# Altium PCB wearable2.PcbDoc
Units mil, origin at the board's own origin, x right, y up, seen from the top; angles counter-clockwise.
Board outline 1023.62 x 1574.8 mil, 4 copper layers (Top Layer, GND, PWR, Bottom Layer), stack 23.756 mil thick; 39 components, 31 nets, 190 pads, 107 vias.
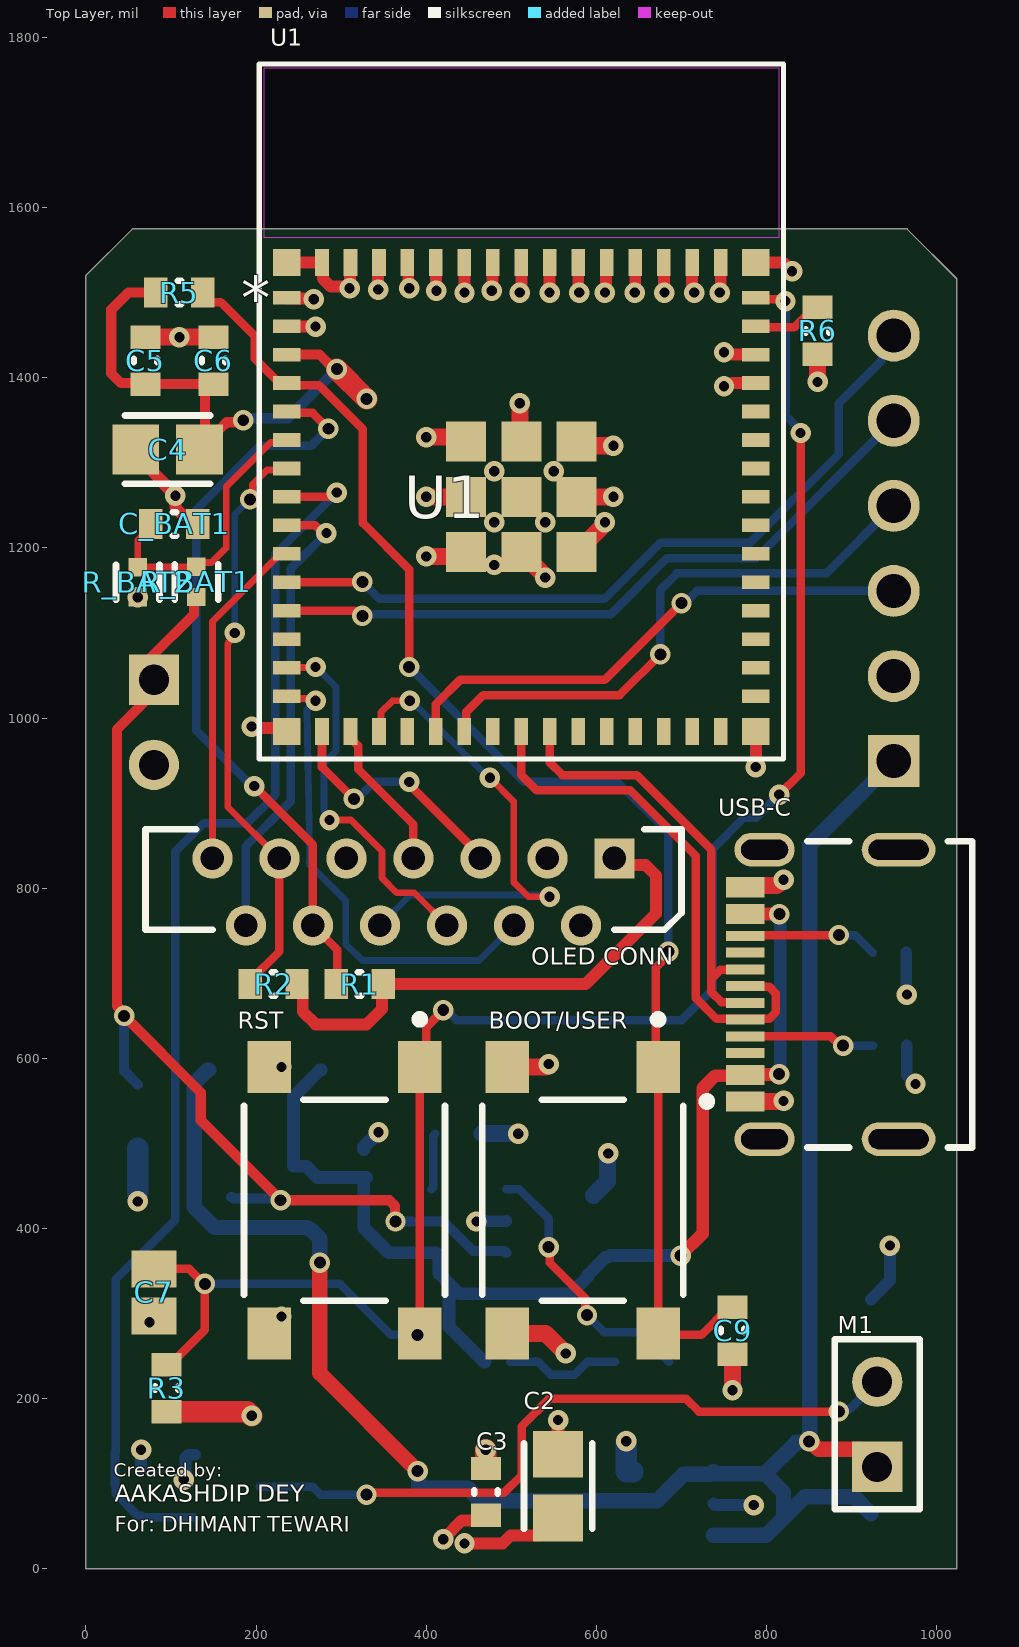
[diagram p0: Top Layer view]
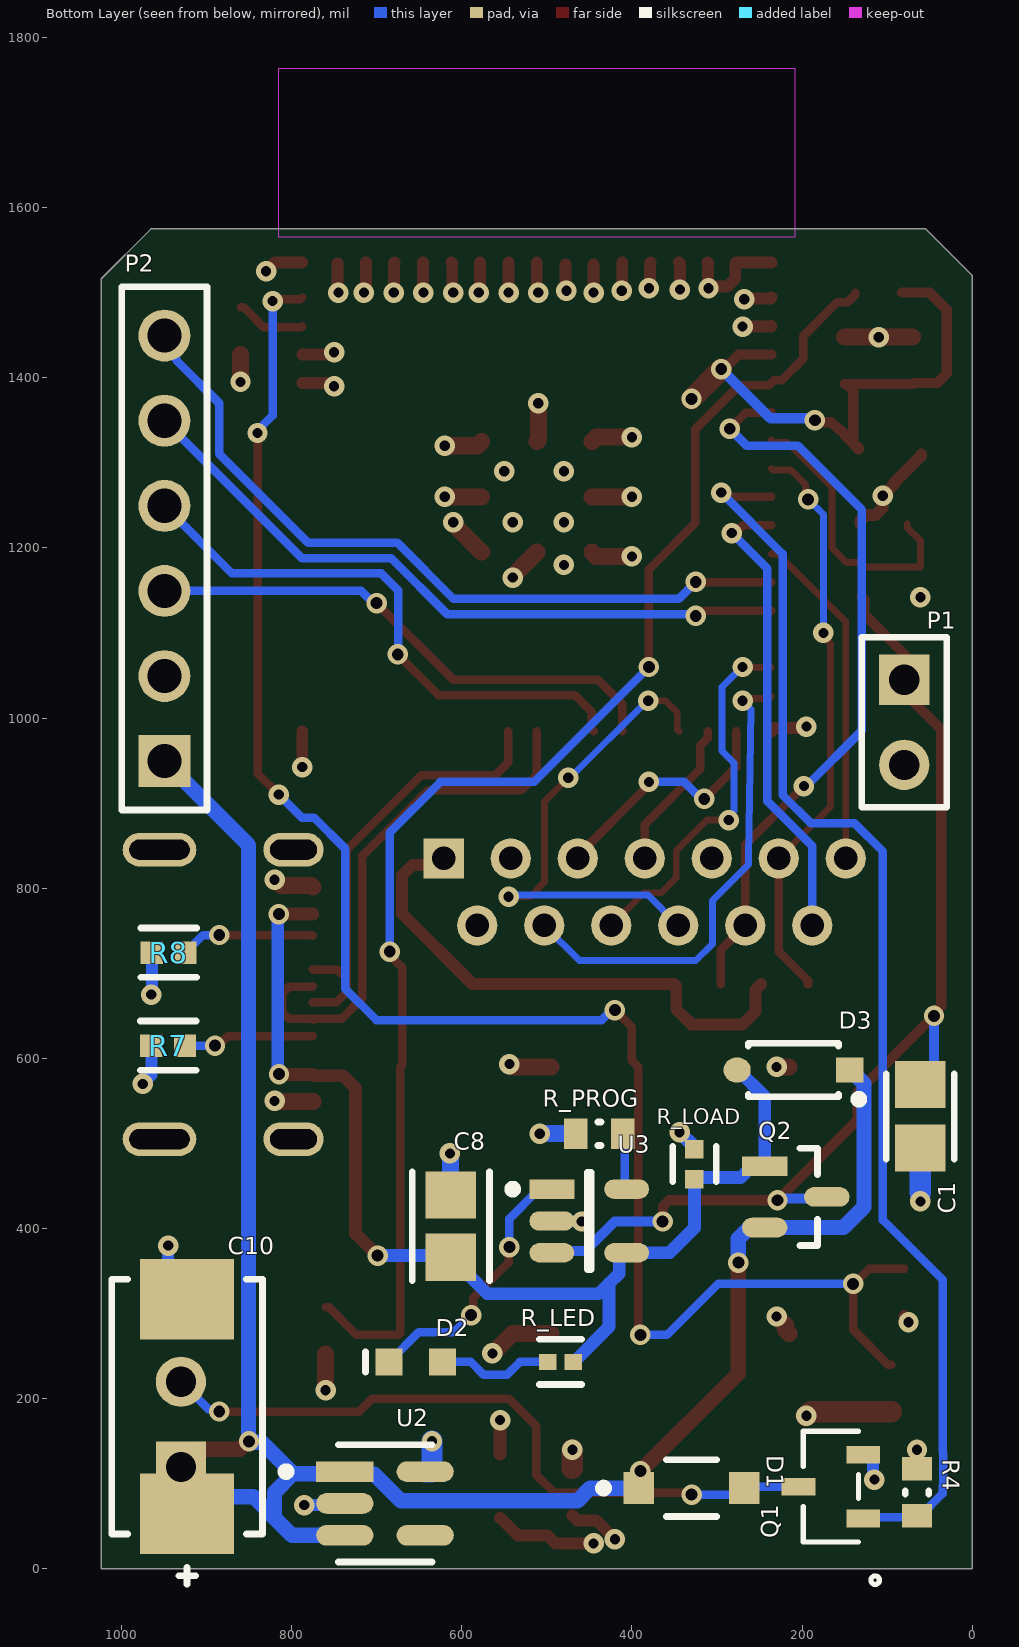
[diagram p1: Bottom Layer view, seen from below]
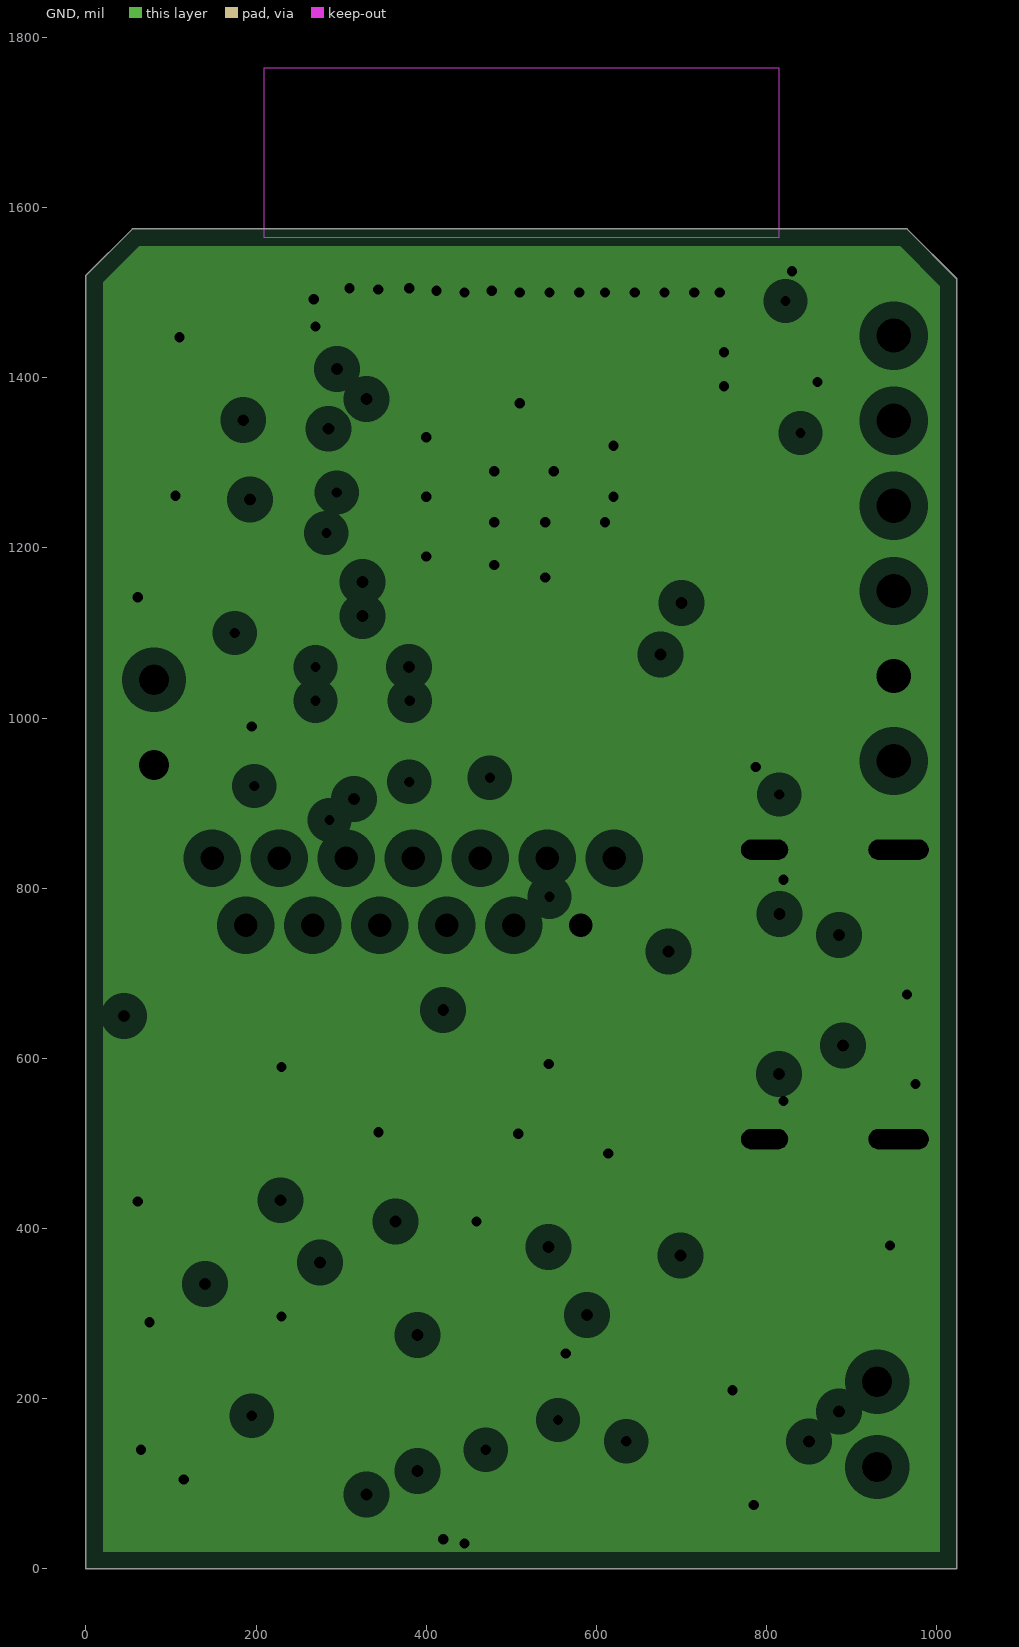
[diagram p2: GND, clearances drawn from the general rule]
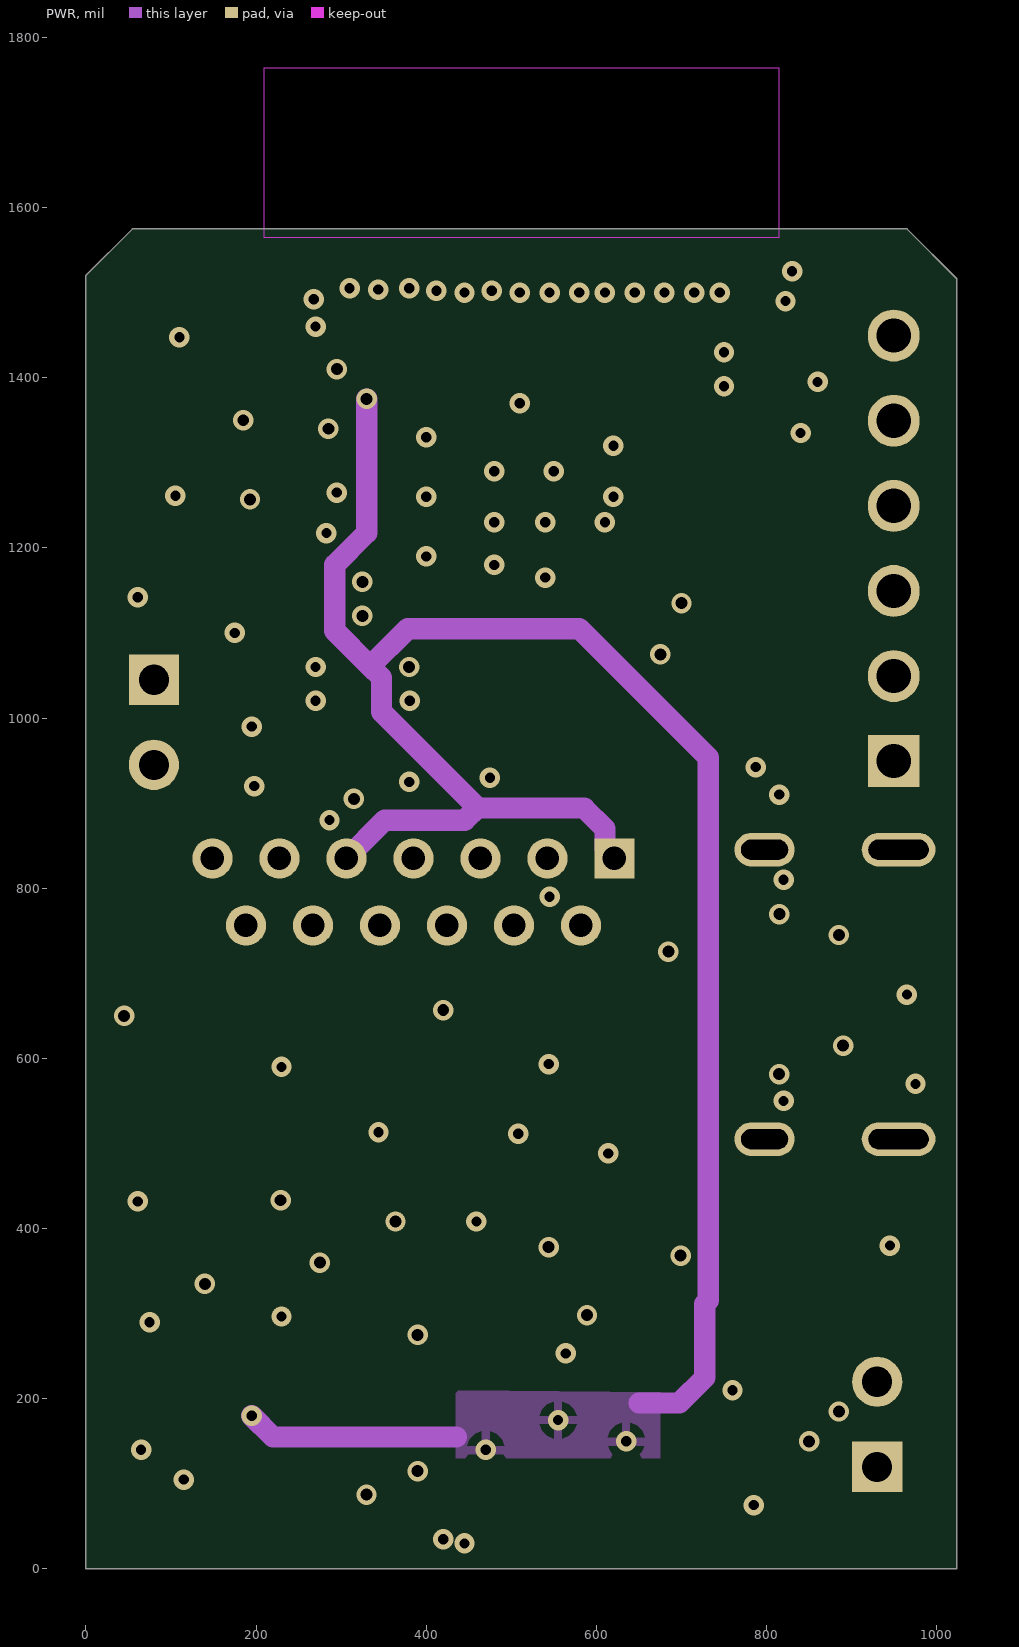
[diagram p3: PWR]
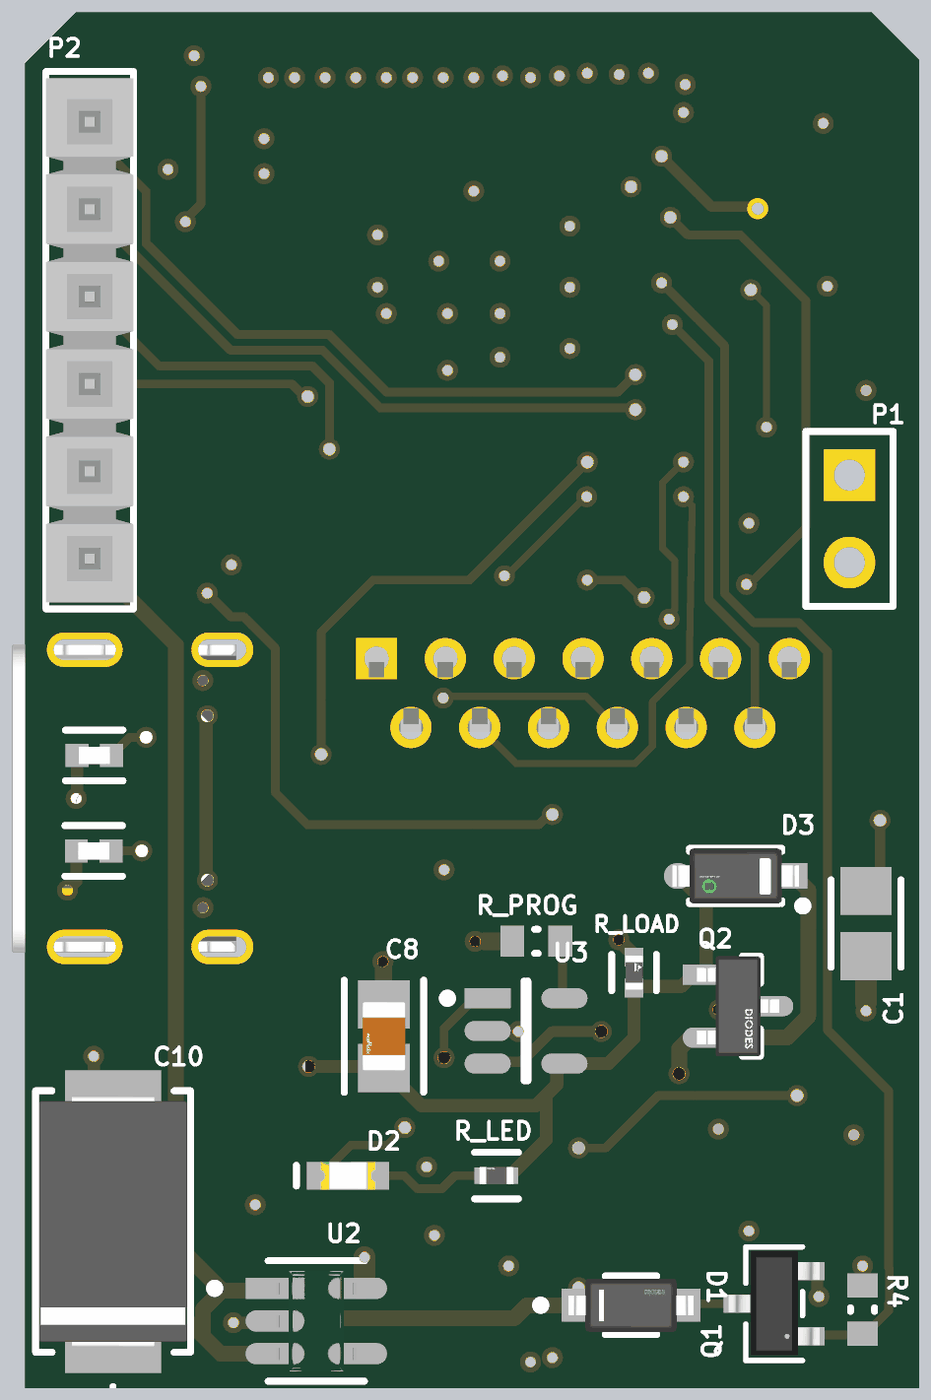
[diagram p4: 3D render of the assembled board from below, using the file's embedded part models]

## Layer stack, top to bottom
Top Solder: solder mask 0.4, Solder Resist, Dk 3.5
Top Layer: signal copper 1.4
Dielectric 2: prepreg 2.8, PP-006, Dk 4.1
GND: plane copper 1.378, net GND
Dielectric 1: dielectric 12.6, FR-4, Dk 4.8
PWR: signal copper 1.378
Dielectric 3: prepreg 2.8, PP-006, Dk 4.1
Bottom Layer: signal copper 1.4
Bottom Solder: solder mask 0.4, Solder Resist, Dk 3.5

## Board outline
0,0 0,1520 54.8,1574.8 965.2,1574.8 1023.62,1516.38 1023.62,0

## Design rules (kind name [scope] priority, off if disabled: settings)
Clearance [All] p1: gap=8 ignorepadtopadclearanceinfootprint=TRUE
PlaneClearance [All] p1: clearance=20
PlaneConnect GND_ESP [InNet('GND')] p1: planeconnectstyle=Direct reliefexpansion=10 reliefentries=4 reliefconductorwidth=10 reliefairgap=8
PlaneConnect [All] p2: planeconnectstyle=Relief reliefexpansion=8 reliefentries=4 reliefconductorwidth=10 reliefairgap=8
PolygonConnect [All] p1: connectstyle=Relief reliefconductorwidth=10 reliefentries=4 polygonreliefangle="90 Angle" airgapwidth=10
RoutingVias [All] p1: holewidth=12 width=24 viastyle="Through Hole" minholewidth=12 minwidth=24 maxholewidth=16 maxwidth=24
SolderMaskExpansion [All] p1: expansion=0 istentingtop=FALSE
SupplyNets "Schematic Supply Nets" [InNet('GND')] p1: voltage=0.000
Width PWR [(InNet('GND') OR InNet('VBUS_5V') OR InNet('3V3_RAIL') OR InNet('VBAT_RAW')) OR InNet('SYS_VCC')] p1: maxlimit=30 minlimit=12 preferedwidth=25
Width [All] p2: maxlimit=10 minlimit=7 preferedwidth=10
28 further rules are at their usual default settings.

## Components (designator, comment, footprint, x,y, rotation, side; value= is the part's Value field where it differs from the comment)
BOOT/USER "PTS645SM43SMTR92LFS" FP-PTS645SM43SMTR92LFS-MFG 583.96,433.31 r270 top (schematic designator SW2)
C1 "CAP_Murata" CAPC2013X135X45ML10T25 61.04,531.88 r270 bottom value=10µF
C2 "CAP_Murata" CAPC2013X135X45ML10T25 555,97.4 r90 top value=10µF
C3 "100nF" 0603C_L 470.16,90.5 r90 top
C4 "CAP_Murata" CAPC2013X135X45ML10T25 96.12,1315.51 r0 top value=10µF
C5 "100nF" 0603C_L 70,1420 r270 top
C6 "100nF" 0603C_L 150,1420 r270 top
C7 "1uF" CAPC2013X145X50LL20T25 80,325 r90 top
C8 "4.7 uF" FP-GCM21B-0_15-IPC_A 612.75,402.84 r270 bottom
C9 "100nF, 50V" 0603C_L 760,280 r90 top
C10 "470uF" FP-ECAS-D4-MFG 922.8,190.77 r90 bottom
C_BAT1 "100nF" 0603C_L 104.08,1228.07 r180 top
D1 "B0540W-7-F" FP-SOD123-MFG 330,95 r180 bottom value=170pF
D2 "LED_Red0603" 0603_A 653.96,243.31 r180 bottom
D3 "MBR0520LT1G" FP-425-04-IPC_C 210.18,586.3 r0 bottom
M1 "Motor" HDR1X2 930,120 r90 top
"OLED CONN" "OLED_FFC" MOLX-52806-1310 621.22,835 r180 top (schematic designator J1)
P1 "Battery Pads" HDR1X2 80,1045 r270 bottom
P2 "SIM_CONN" SMTC-TSW-106-23-X-S 949.49,949.39 r90 bottom
Q1 "SI2302CDS-T1-GE3" TO-236_VIS-L 166.15,96.78 r90 bottom
Q2 "DMG2305UX-7" FP-SOT23-IPC_B 207.47,437.29 r180 bottom
R1 "4.7k" 0603_L 321.74,687.41 r0 top
R2 "4.7k" 0603_L 220.64,687.41 r0 top
R3 "10k" 0603_L 95,212.44 r90 top
R4 "10k" 0603_L 65,90 r270 bottom
R5 "10k" 0603_L 110,1500 r180 top
R6 "10k" 0603_L 860,1455 r270 top
R7 "5.1K" FP-CRCW0402-e3-IPC_A 945,615 r0 bottom
R8 "5.1K" FP-CRCW0402-e3-IPC_A 944.37,724.25 r0 bottom
R_BAT1 "100k" FP-MCS0402-MFG 130,1160 r90 top
R_BAT2 "100k" FP-MCS0402-MFG 60.94,1159.66 r270 top
R_LED "1K" FP-AC0402-IPC_C 483.96,243.31 r0 bottom
R_LOAD "100k" FP-MCS0402-MFG 326.56,475.75 r90 bottom
R_PROG "10k" 0603_L 438.3,511.49 r0 bottom
RST "PTS645SM43SMTR92LFS" FP-PTS645SM43SMTR92LFS-MFG 303.96,433.31 r270 top (schematic designator SW1)
U1 "ESP32-S3-MINI-1-N8" ESP32-S3-MINI-1_EXP 511.81,1360.34 r0 top
U2 "AP2112K-3.3TRG1" FP-SOT25-IPC_A 690.19,76.97 r180 bottom
U3 "MCP73831T-2ACI/OT" FP-C04-091-OT-IPC_B 450.16,408.97 r180 bottom
USB-C "217179-0001" FP-2171790001-MFG 909.9,675.19 r90 top (schematic designator USB_J)

## Footprints (in the part's own frame and the unit in brackets; to place one, negate y for a bottom-side part, rotate by r counter-clockwise, add the part's x,y. Pads: shape width x height; smd on the part's side, far side on the other; paste and mask are expansions set on the pad)
0603_A [mm]
  rect 0.8x0.8 smd: 1(-0.8,0) 2(0.8,0)
  silkscreen extent -1.5,-0.3 -1.5,0.3, body extent -0.8,-0.4 0.8,0.4, height 0.7
0603_L [mm]
  rect 0.7x0.9 smd: 1(-0.7,0) 2(0.7,0)
  silkscreen extent -0.05,-0.35 0.05,0.35, body extent -0.85,-0.47 0.85,0.47, height 0.6
0603C_L [mm]
  rect 0.7x0.9 smd: 1(-0.7,0) 2(0.7,0)
  silkscreen extent -0.05,-0.35 0.05,0.35, body extent -0.87,-0.47 0.88,0.48, height 1
CAPC2013X135X45ML10T25 [mm]
  rect 1.4x1.5 smd: 1(-0.95,0) 2(0.95,0)
  silkscreen extent -1.27,-1.02 1.27,1.02, body extent -1.05,-0.67 1.05,0.67, height 1.35
CAPC2013X145X50LL20T25 [mm] "Chip Capacitor, 2-Leads, Body 2.00x1.25mm, IPC High Density"
  rect 1.1x1.35 smd: 1(-0.7,0) 2(0.7,0)
  body extent -1.1,-0.72 1.1,0.72, height 1.45
ESP32-S3-MINI-1_EXP [mil]
  rect 32x16 smd paste+0 mask+0: 1(-275.59,133.75) 2(-275.59,100.29) 3(-275.59,66.82) 4(-275.59,33.36) 5(-275.59,-0.11) 6(-275.59,-33.57) 7(-275.59,-67.04) 8(-275.59,-100.5) 9(-275.59,-133.96) 10(-275.59,-167.43) 11(-275.59,-200.89) 12(-275.59,-234.36) 13(-275.59,-267.82) 14(-275.59,-301.29) 15(-275.59,-334.75) 31(275.59,-334.75) 32(275.59,-301.29) 33(275.59,-267.82) 34(275.59,-234.36) 35(275.59,-200.89) 36(275.59,-167.43) 37(275.59,-133.96) 38(275.59,-100.5) 39(275.59,-67.04) 40(275.59,-33.57) 41(275.59,-0.11) 42(275.59,33.36) 43(275.59,66.82) 44(275.59,100.29) 45(275.59,133.75)
  rect 16x32 smd paste+0 mask+0: 16(-234.25,-376.09) 17(-200.79,-376.09) 18(-167.32,-376.09) 19(-133.86,-376.09) 20(-100.39,-376.09) 21(-66.93,-376.09) 22(-33.46,-376.09) 23(0,-376.09) 24(33.46,-376.09) 25(66.93,-376.09) 26(100.39,-376.09) 27(133.86,-376.09) 28(167.32,-376.09) 29(200.79,-376.09) 30(234.25,-376.09) 46(234.25,175.09) 47(200.79,175.09) 48(167.32,175.09) 49(133.86,175.09) 50(100.39,175.09) 51(66.93,175.09) 52(33.46,175.09) 53(0,175.09) 54(-33.46,175.09) 55(-66.93,175.09) 56(-100.39,175.09) 57(-133.86,175.09) 58(-167.32,175.09) 59(-200.79,175.09) 60(-234.25,175.09)
  rect 47x47 smd paste+0 mask+0: 61(0,-100.5) 66(-64.96,-35.54) 67(-64.96,-100.5) 68(-64.96,-165.46) 69(0,-165.46) 70(64.96,-165.46) 71(64.96,-100.5) 72(64.96,-35.54) 73(0,-35.54)
  rect 32x32 smd paste-16 mask-16: 62(-275.59,175.09) 63(-275.59,-376.09) 64(275.59,-376.09) 65(275.59,175.09)
  Keep-Out Layer region: 303,403.5 -303,403.5 -303,204.5 303,204.5
  silkscreen extent -308,-409 308,408
FP-425-04-IPC_C [mm]
  rect 0.808x0.742 smd paste+0 mask+0: 1(-1.68,0)
  rrect100% 0.808x0.742 smd paste+0 mask+0: 2(1.68,0)
  silkscreen extent -2.07,-0.8 1.35,1, body extent -1.84,-0.8 1.84,0.8, height 1.35
FP-2171790001-MFG [mm]
  rrect100% 1x1.8 hole 1.4 slot 0.6 at 0 deg paste-2539.97 mask+0: 1(-4.32,2.85) 2(4.32,2.85)
  rrect100% 1x2.2 hole 1.8 slot 0.6 at 0 deg paste-2539.97 mask+0: 3(-4.32,-1.15) 4(4.32,-1.15)
  rect 0.6x1.15 smd paste+0 mask+0: A1-B12(-3.2,3.425) A4-B9(-2.4,3.425) B1-A12(3.2,3.425) B4-A9(2.4,3.425)
  rect 0.3x1.15 smd paste+0 mask+0: A5(-1.25,3.425) A6(-0.25,3.425) A7(0.25,3.425) A8(1.25,3.425) B5(1.75,3.425) B6(0.75,3.425) B7(-0.75,3.425) B8(-1.75,3.425)
  silkscreen extent -4.57,-3.35 4.57,4.7, body extent -4.92,-3.45 4.92,4.1, height 0.25
FP-AC0402-IPC_C [mil]
  rect 20.29x18.6 smd paste+0 mask+0: 1(-14.9,0) 2(14.9,0)
  silkscreen extent -25,-27 25,27, body extent -20,-10 20,10, height 15
FP-C04-091-OT-IPC_B [mm]
  rect 1.338x0.578 smd paste+0 mask+0: 1(-1.116,0.95)
  rrect100% 1.338x0.578 smd paste+0 mask+0: 2(-1.116,0) 3(-1.116,-0.95) 4(1.116,-0.95) 5(1.116,0.95)
  silkscreen extent -2.41,-1.45 0.05,1.45
FP-CRCW0402-e3-IPC_A [mil]
  rect 26.31x26.48 smd paste+0 mask+0: 1(-19.77,0) 2(19.77,0)
  silkscreen extent -33,-29 33,29, body extent -20,-10 20,10, height 16
FP-ECAS-D4-MFG [mm]
  rect 2.4x2.8 smd paste+0 mask+0: 1(3.2,0) 2(-3.2,0)
  silkscreen extent -5.3,-2.25 3.8,2.25, body extent -3.65,-2.15 3.65,2.15, height 2
FP-GCM21B-0_15-IPC_A [mil]
  rect 55.34x59.38 smd paste+0 mask+0: 1(-36.47,0) 2(36.47,0)
  silkscreen extent -64,-45 64,45, body extent -39,-25 39,25, height 55
FP-MCS0402-MFG [mm]
  rect 0.55x0.55 smd paste+0 mask+0: 1(-0.45,0) 2(0.45,0)
  silkscreen extent -0.53,-0.65 0.53,0.65, body extent -0.82,-0.38 0.82,0.38, height 0.25
FP-PTS645SM43SMTR92LFS-MFG [mm]
  rect 1.55x1.3 smd paste+0 mask+0: 1(-3.975,2.25) 2(3.975,2.25) 3(-3.975,-2.25) 4(3.975,-2.25)
  silkscreen extent -5.52,-3 3,3, body extent -4.85,-3.1 4.85,3.1, height 0.25
FP-SOD123-MFG [mm]
  rect 0.9x0.95 smd paste+0 mask+0: 1(-1.575,0) 2(1.575,0)
  silkscreen extent -2.75,-0.85 0.75,0.85, body extent -1.83,-0.77 1.83,0.77, height 1.45
FP-SOT23-IPC_B [mm]
  rect 1.359x0.587 smd paste+0 mask+0: 1(-0.927,0.915)
  rrect100% 1.359x0.587 smd paste+0 mask+0: 2(-0.927,-0.915) 3(0.927,0)
  silkscreen extent 0.13,-1.45 0.65,1.45, body extent -1.2,-1.45 1.2,1.45, height 1.1
FP-SOT25-IPC_A [mm]
  rect 1.707x0.616 smd paste+0 mask+0: 1(-1.201,0.95)
  rrect100% 1.707x0.616 smd paste+0 mask+0: 2(-1.201,0) 3(-1.201,-0.95) 4(1.201,-0.95) 5(1.201,0.95)
  silkscreen extent -3.08,-1.75 1.4,1.75, body extent -1.4,-1.47 1.4,1.45, height 1.45
HDR1X2 [mm] "Connector; Header; 2 Position"
  rect 1.5x1.5 hole 0.9: 1(0,0)
  round 1.5 hole 0.9: 2(2.54,0)
  silkscreen extent -1.27,-1.27 3.81,1.27
MOLX-52806-1310 [mm] "FFC Connector, 13-Leads, Vertical, Pitch 1.0 mm, Mated Height 5.4 mm, Through Hole"
  rect 1.2x1.2 hole 0.7: 1(0,0)
  round 1.2 hole 0.7: 2(1,2) 3(2,0) 4(3,2) 5(4,0) 6(5,2) 7(6,0) 8(7,2) 9(8,0) 10(9,2) 11(10,0) 12(11,2) 13(12,0)
  silkscreen extent -2,-0.87 14,2.13, body extent -2,-0.87 14,2.13, height 5.41
SMTC-TSW-106-23-X-S [mm] ".025 SQ Post Terminal Strip Assembly, 1x6 Pins, Vertical, 2.54mm Pitch, Male"
  rect 1.55x1.55 hole 1.02: 1(0,0)
  round 1.55 hole 1.02: 2(2.54,0) 3(5.08,0) 4(7.62,0) 5(10.16,0) 6(12.7,0)
  silkscreen extent -1.46,-1.27 14.16,1.27, body extent -1.27,-1.27 13.97,1.27, height 8.38
TO-236_VIS-L [mm]
  rect 0.528x1.01 smd paste+0 mask+0: 1(-0.95,-0.966) 2(0.95,-0.966) 3(0,0.966)
  silkscreen extent -2.92,-1.45 1.65,0.83, body extent -1.52,-1.32 1.52,1.32, height 1.12

## Part data
BOOT/USER RST: library part CMP-2000-05160-2, "SWITCH TACTILE SPST-NO 0.05A 12V", Case/Package=SMD/SMT, Color=Black, Contact Resistance=100mR, Current Rating=50mA, Max Operating Temperature=60°C, Max Voltage Rating (DC)=12V, Min Operating Temperature=-20°C, Operating Force=160gf, Package Quantity=1, Actuator Length=0.85mm, Actuator Material=Nylon, Actuator Type=Standard, Contact Material=Silver, Contact Plating=Silver, Depth=9mm, Illumination Type=Non-Illuminated, Lead Free="Lead Free", Length=6mm, Max Current Rating=50mA, Mechanical Life=100000Cycles, Mount="Surface Mount", Orientation=Straight, Packaging="Tape and Reel", REACH SVHC="No SVHC", Switch Function=Off-Mom, Termination="Gull Wing", Throw Configuration=SPST, Voltage Rating (DC)=12V
C1 C2 C4: library part CAP_10uF_25V_0805, "Ceramic Capacitor, Multilayer, Ceramic, 25V, 10% +Tol, 10% -Tol, X5R, 15% TC, 10uF, Surface Mount, 0805", Capacitor Type=Ceramic, Case/Package=0805, Manufacturer=Murata, Manufacturer Part Number=GRM21BR61E106KA73L, Max Operating Temperature=85°C, Min Operating Temperature=-55°C, Tolerance=10%, Component Type=Capacitors, Mounting Technology="Surface Mount", Pins=2, RoHS Compliant=Yes
C3 C5 C6 C_BAT1: library part Cap100nF_50V_0603, "Ceramic Capacitor, Multilayer, Ceramic, 50V, 80% +Tol, 20% -Tol, Y5V, -82/+22% TC, 0.1uF, Surface Mount, 0603", Capacitor Type=Ceramic, Case/Package=0603, Manufacturer=Yageo, Manufacturer Part Number=CC0603ZRY5V9BB104, Max Operating Temperature=85°C, Min Operating Temperature=-30°C, Package Shape=Rectangular, Package Style=SMTMeter, Rated DC Voltage (URdc)=50V, Temperature Characteristics Code=Y5V, Tolerance  (fill in as +-)=20%, Tolerance (fill in as +-)=80%, Component Type=Capacitors, Dielectric Material=Ceramic, Height=0.8mm, JESD-609 Code=e3, Length=1.6mm, Mounting Technology="Surface Mount", Multilayer=Yes, Packaging="Tape and Reel", Pins=2, Reach SVHC Compliant=Yes, RoHS Compliant=Yes, Terminal Finish=Nickel, Termination=Wraparound, Voltage Rating=50V, Width=0.8mm
C7: library part CMP-1036-04746-2, Manufacturer=Kemet, Part Number=C0805C105K4PACTU
C8: library part CMP-06035-015394-1, "Ceramic Capacitor for Automotive 4.7uF ±20% 16VDC X7R 0805 Embossed T/R"
C9: library part CL05B104KB54PNC, "CAP CER 0.1UF 50V X7R 0402", Capacitor Type=Ceramic, LCSC Part Number=C307331, Manufacturer=Samsung, Supplier Part Number=1276-CL05B104KB54PNCCT-ND, Category="Ceramic Capacitors", ComponentLink1Description=https://datasheet.ciiva.com:443/pdfs/VipMasterIC/IC/SEMS/SEMS-S-A0006318249/SEMS-S-A0006320959-1.pdf?src-supplier=IHS+Markit, ComponentLink1URL=https://datasheet.ciiva.com:443/pdfs/VipMasterIC/IC/SEMS/SEMS-S-A0006318249/SEMS-S-A0006320959-1.pdf?src-supplier=IHS+Markit, ComponentLink2Description=https://datasheet.octopart.com/CL05B104KB54PNC-Samsung-datasheet-8326407.pdf?src-supplier=TME, ComponentLink2URL=https://datasheet.octopart.com/CL05B104KB54PNC-Samsung-datasheet-8326407.pdf?src-supplier=TME, Dielectric Material=Ceramic, Manufacturer Part Number=CL05B104KB54PNC, Pins=2, Pricing="1=0.1, 10=0.044, 50=0.025, 100=0.0194, 500=0.0146, 1000=0.01147, 2500=0.01043, 5000=0.00959 (USD)", Reach SVHC Compliant=Yes, RoHS=Yes, RoHS Compliant=Yes, Stock=1237875, Supplier=Digikey
C10: library part CMP-00260-140750078-1, "ECASD40E477M006KA0 Cap, 470UF, 2.5V, Alu Polymer, 2917 Rohs Compliant: Yes", Capacitance=470µF, Case/Package=2917, ESR (Equivalent Series Resistance)=6mΩ, Leakage Current=117.5µA, Max Operating Temperature=105°C, Min Operating Temperature=-40°C, Ripple Current=7.5A, Tolerance=20%, Voltage Rating=2.5V, Dissipation Factor=6%, Height=2mm, Life (Hours)=2000hours, NexarPartId=140750078
D1: library part CMP-2000-05880-2, "DIODE SCHOTTKY 40V 500MA SOD123", Capacitance=170pF, Forward Current=0.5A, Manufacturer="Diodes Inc.", Max Junction Temp=+150°C, Max Repetitive Reverse Voltage=40V, Max Surge Forward Current=5.5A, Package=SOD123, Peak Reverse Current=20uA, Temperature="-65°C to +150°C", Temperature Range Low=-65°C, Automotive=Yes, Automotive Grade="Grade 0", Category=Diode, ComponentLink2Description=Datasheet, ComponentLink2URL=https://www.diodes.com/assets/Datasheets/ds30138.pdf, Device Class L1="Discrete Semiconductors", Device Class L2=Diodes, Device Class L3="Schottky Diodes", Digikey Description="DIODE SCHOTTKY 40V 500MA SOD123", Footprint Url=https://www.diodes.com/assets/Package-Files/SOD123.pdf, Height=1.45mm, Lead Free=Yes, Manufacturer Part Number=B0540W-7-F, Mouser Description="Schottky Diodes & Rectifiers 40V 410mW", Octopart=https://octopart.com/b0540w-7-f-diodes+inc.-325656, Reverse Voltage=40V, RoHS=TRUE, Standoff Height=0mm, Temperature Range High=+150°C
D2: "Single Color LED, Red, Water Clear, 1.1mm", Case/Package=0603, Color=Red, Colour=RED, Forward Current=30mA, Forward Voltage=2V, Manufacturer="Wurth Electronics", Manufacturer Part Number=150060RS75000, Max Operating Temperature=85°C, Min Operating Temperature=-40°C, Component Type=LED, Lens Style="WATER CLEAR", Luminous Intensity-Nom=250mcd, Mounting Technology="Surface Mount", Optoelectronic Device Type="SINGLE COLOR LED", Overall Height=0.7mm, Pins=2, RoHS Compliant=Yes, Shape=Rectangular, Size=1.1mm, Terminal Pitch=1.6mm, Viewing Angle=140°
D3: library part CMP-1055-00425-2, "DIODE SCHOTTKY 20V 500MA SOD123", Average Rectified Current=500mA, Case/Package=SOD-123-2, Forward Voltage=385mV, Max Forward Surge Current (Ifsm)=5.5A, Max Operating Temperature=125°C, Max Repetitive Reverse Voltage (Vrrm)=20V, Max Reverse Leakage Current=250uA, Min Operating Temperature=-65°C, Package Quantity=3000, Contact Plating=Tin, Current Rating=500mA, Element Configuration=Single, Forward Current=500mA, Height=1.12mm, Lead Free="Lead Free", Length=2.69mm, Max Reverse Voltage (DC)=20V, Max Surge Current=5.5A, Number of Pins=2, Output Current=500mA, Packaging="Tape and Reel", Peak Non-Repetitive Surge Current=5.5A, Peak Reverse Current=250uA, Polarity=Standard, Radiation Hardening=No, REACH SVHC="No SVHC", Termination=SMD/SMT, Voltage Rating (DC)=20V, Width=1.6mm
M1 P1: library part "Header 2", "Header, 2-Pin", LatestRevisionDate=17-Jul-2002, LatestRevisionNote="Re-released for DXP Platform.", Publisher="Altium Limited"
"OLED CONN": library part CMP-1242-00170-1, "1.0 mm Pitch FFC Connector, 5.4 mm Mated Height, Vertical, Non-ZIF, Through Hole, 13 Circuits, -20 to 80 degC, ELV and RoHS Compliant, Tray", Current (Max per Contact)=0.5A, Manufacturer=Molex, PartNumber=52806-1310, Voltage (Max)="50V AC (RMS)/DC", Circuits (Loaded)=13, Circuits (maximum)=13, ComponentLink1Description="Manufacturer URL", ComponentLink1URL=http://www.molex.com/molex/index.jsp, ComponentLink2Description=Datasheet, ComponentLink2URL=http://www.molex.com/webdocs/datasheets/pdf/en-us/0528061310_FFC_FPC_CONNECTORS.pdf, ComponentLink3Description="Package Specification", ComponentLink3URL=http://www.molex.com/pdm_docs/sd/528061310_sd.pdf, Contact Position=N/A, Durability (mating cycles max)=10, Entry Angle=Vertical, Mated Height=5.40mm, Material - Metal="Phosphor Bronze", Material - Plating Mating=Tin, Material - Plating Termination=Tin, Mounting Technology="Through Hole", Number of Rows=1, Orientation=Vertical, PackageDescription="13-Lead FFC Connector, Pitch 1.0 mm", PackageReference=52806-1310, PackageVersion="Rev. B, 08/2002", Packing=Tray, PCB Locator=No, PCB Retention=None, Pitch - Mating Interface=1.00mm, Pitch - Termination Interface=1.00mm, Polarized to PCB=No, RoHS=TRUE, Stackable=No
P2: library part CMP-1024-00397-1, "0.025\" SQ Post Header, Through-hole, Vertical, -55 to 125 degC, 2.54 mm Pitch, 6-Pin, Male, RoHS", Manufacturer=Samtec, PartNumber=TSW-106-23-L-S, Temperature Range="-55 to 125 degC", ComponentLink1Description="Manufacturer URL", ComponentLink1URL=http://www.samtec.com, ComponentLink2Description=Datasheet, ComponentLink2URL=http://www.samtec.com/documents/webfiles/pdf/TSW_TH.PDF, ComponentLink3Description="Package Specification", ComponentLink3URL=http://www.samtec.com/documents/webfiles/cpdf/TSW-XXX-XX-XXX-X-XX-XXX-MKT.pdf, DatasheetVersion=F-214, Mounting Technology=Through-hole, Orientation=Vertical, PackageDescription=".025[0.64] SQ. Post Terminal Strip Assembly", PackageReference=TSW-106-23-X-S, PackageVersion="DM, 8/1988", Pitch="2.54 mm", RoHS=True
Q1: "N-CHANNEL 20-V (D-S) MOSFET", Manufacturer_Name=Vishay, Copyright="Copyright (C) 2026 Ultra Librarian. All rights reserved.", Manufacturer_Part_Number=SI2302CDS-T1-GE3, RefDes=RefDes, Type=Type
Q2: library part CMP-1693-00002-4, "MOSFET P-CH 20V 4.2A SOT23", Case/Package=SOT-23, Continuous Drain Current (ID)=4.2A, Drain to Source Resistance=200mR, Drain to Source Voltage (Vdss)=20V, Gate to Source Voltage (Vgs)=8V, Input Capacitance=808pF, Max Operating Temperature=150°C, Max Power Dissipation=1.4W, Min Operating Temperature=-55°C, On-State Resistance=52MR, Package Quantity=3000, Threshold Voltage=-900mV, Contact Plating=Tin, Element Configuration=Single, Fall Time=34.7ns, Height=1.1mm, Lead Free="Lead Free", Length=3mm, Mount="Surface Mount", Number of Channels=1, Number of Pins=3, Packaging="Tape and Reel", Radiation Hardening=No, Rds On Max=52mR, REACH SVHC="No SVHC", Rise Time=13.7ns, Turn-Off Delay Time=79.3ns, Turn-On Delay Time=10.8ns, Weight=0.000282oz, Width=1.4mm
R1 R2: library part Res4K7_0603, "Res4K7_0603", Manufacturer=Yageo, Operating Temperature="-55°C ~ 155°C", Package / Case="0603 (1608 Metric)", Power (Watts)="0.1W, 1/10W", Supplier Device Package=0603, Temperature Coefficient=±25ppm/°C, Tolerance=0.5%, Category=Resistors, Component Type=Resistors, ComponentLink1Description=http://www.yageo.com/documents/recent/PYu-RT_1-to-0.05_RoHS_L_6.pdf, ComponentLink1URL=http://www.yageo.com/documents/recent/PYu-RT_1-to-0.05_RoHS_L_6.pdf, Composition="Thin Film", Design Item ID=Res4K7_0603, Failure Rate=-, Features="Moisture Resistant", Height="0.022\" (0.55mm)", Number of Terminations=2, Packaging="Cut Tape (CT)", Part Status=Active, Pricing 1="1=0.22, 10=0.184, 25=0.134, 100=0.0721, 250=0.05532, 500=0.04358, 1000=0.03018, 2500=0.02766 (USD)", Resistance (Ohms)=4.7k, RoHS="RoHS Compliant", Size / Dimension="0.063\" L x 0.031\" W (1.60mm x 0.80mm)", Source=WCT.SchLib, Stock 1=28874
R3 R4 R5 R6 R_PROG: library part Res10K_0603, "Res10K_0603", Manufacturer="Panasonic Electronic Components", Manufacturer Part Number=ERJ-3GEYJ102V, Operating Temperature="-55°C ~ 155°C", Package / Case="0603 (1608 Metric)", Power (Watts)="0.1W, 1/10W", Supplier Device Package=0603, Temperature Coefficient=±200ppm/°C, Tolerance=5%, Category=Resistors, Component Type=Resistors, Composition="Thick Film", Design Item ID=Res10K_0603, Failure Rate=-, Features="Automotive AEC-Q200", Height="0.022\" (0.55mm)", Number of Terminations=2, Packaging="Cut Tape (CT)", Part Status=Active, Resistance (Ohms)=10k, RoHS="RoHS Compliant", Size / Dimension="0.063\" L x 0.031\" W (1.60mm x 0.80mm)", Source=WCT.SchLib
R7 R8: library part CMP-02407-004842-1, "RES Thick Film, 5.1kΩ, 5%, 0.063W, 200ppm/°C, 0402", Case/Package=0402, Max Operating Temperature=155°C, Max Power Dissipation=63mW, Min Operating Temperature=-55°C, Package Quantity=50000, Resistance=5.1kR, Temperature Coefficient=200ppm/°C, Tolerance=5%, Composition="Thick Film", Features="Automotive AEC-Q200", Height=0.016inch, Lead Free="Lead Free", Length=0.039inch, Number of Terminations=2, Packaging="Tape and Reel", Width=0.02inch
R_BAT1 R_BAT2 R_LOAD: library part CMP-02407-011782-1, "RES SMD 1.2K OHM 1% 1/10W 0402", Case Code (Imperial)=0402, Case Code (Metric)=1005, Max Operating Temperature=125°C, Max Power Dissipation=63mW, Min Operating Temperature=-55°C, Package Quantity=1000, Resistance=100kR, Resistor Type="Thin Film", Temperature Coefficient=25ppm/°C, Tolerance=0.1%, Voltage Rating=50V, Case/Package=0402, Construction=Rectangular, Contact Plating=Tin, Depth=0.5mm, Height=0.015inch, Lead Free="Lead Free", Length=1mm, Military Standard=Not, Number of Terminations=2, Packaging="Tape and Reel", Power Rating=63mW, Radiation Hardening=No, RoHS Compliant=Yes, Series="MCS 0402 - Precision", Voltage Rating (DC)=50V, Weight=2.1E-05oz, Width=0.5mm
R_LED: library part CMP-03412-047873-1, "RES 1kΩ ±1% 0.063W 0402", RoHS Compliant=Yes
U1: library part ESP32-S3, "SMD module, ESP32-S3FN8, 8 MB SPI flash, PCB antenna", LCSC Part No.=C2913206, Manufacturer="Espressif Systems", Supplier Part Number=5407-ESP32-S3-MINI-1-N8CT-ND, Category="RF Transceiver Modules and Modems", ComponentLink1Description=https://datasheet.octopart.com:443/ESP32-S3-MINI-1-N8-Espressif-Systems-datasheet-194171672.pdf?src-supplier=LCSC, ComponentLink1URL=https://datasheet.octopart.com:443/ESP32-S3-MINI-1-N8-Espressif-Systems-datasheet-194171672.pdf?src-supplier=LCSC, ComponentLink2Description=https://datasheet.octopart.com:443/ESP32-S3-MINI-1-N8-Espressif-Systems-datasheet-188867343.pdf?src-supplier=TME, ComponentLink2URL=https://datasheet.octopart.com:443/ESP32-S3-MINI-1-N8-Espressif-Systems-datasheet-188867343.pdf?src-supplier=TME, ComponentLink3Description=https://datasheet.octopart.com:443/ESP32-S3-MINI-1-N8-Espressif-Systems-datasheet-165560562.pdf?src-supplier=TME, ComponentLink3URL=https://datasheet.octopart.com:443/ESP32-S3-MINI-1-N8-Espressif-Systems-datasheet-165560562.pdf?src-supplier=TME, ComponentLink4Description=https://datasheet.octopart.com:443/ESP32-S3-MINI-1-N8-Espressif-Systems-datasheet-165560559.pdf?src-supplier=TME, ComponentLink4URL=https://datasheet.octopart.com:443/ESP32-S3-MINI-1-N8-Espressif-Systems-datasheet-165560559.pdf?src-supplier=TME, ComponentLink5Description=https://datasheet.octopart.com:443/ESP32-S3-MINI-1-N8-Espressif-Systems-datasheet-192318068.pdf?src-supplier=HQonline, ComponentLink5URL=https://datasheet.octopart.com:443/ESP32-S3-MINI-1-N8-Espressif-Systems-datasheet-192318068.pdf?src-supplier=HQonline, Manufacturer Part Number=ESP32-S3-MINI-1-N8, Pricing="1=5.43, 10=4.703, 25=4.4492, 100=4.0995, 250=3.89008 (USD)", RoHS=Compliant, Stock=7176, Supplier=DigiKey
U2: library part CMP-12756-000035-1, "IC REG LINEAR 3.3V 600MA SOT25", Case/Package=SOT-23-5, Dropout Voltage=250mV, Max Input Voltage=6V, Max Operating Temperature=85°C, Max Output Current=600mA, Min Input Voltage=2.5V, Min Operating Temperature=-40°C, Output Voltage=3.3V, Package Quantity=1, Quiescent Current=55uA, Accuracy=1.5%, Height=1.3mm, Lead Free="Lead Free", Length=3.1mm, Mount="Surface Mount", Number of Outputs=1, Number of Pins=5, Number of Regulators=1, Output Current=600mA, Output Type=Fixed, Packaging="Tape and Reel", Polarity=Positive, Width=1.7mm
U3: library part CMP-0133-00143-2, "IC CONTROLLR LI-ION 4.2V SOT23-5", Case/Package=SOT-23, Drain to Source Resistance=350mR, Max Charge Current=500mA, Max Input Voltage=6V, Max Operating Temperature=85°C, Max Output Voltage=4.5V, Max Power Dissipation=1.54W, Min Operating Temperature=-40°C, Min Output Voltage=4.168V, Min Supply Voltage=3.75V, Output Voltage=4.2V, Voltage Rating=4.534V, Contact Plating=Tin, Height=0.051inch, Lead Free="Lead Free", Length=0.122inch, Max Supply Voltage=6V, Mount="Surface Mount", Number of Cells=1, Number of Channels=1, Number of Outputs=1, Number of Pins=5, Output Current=500mA, Packaging="Tape and Reel", Radiation Hardening=No, REACH SVHC="No SVHC", Termination=SMD/SMT, Weight=0.00709oz, Width=0.071inch
USB-C: library part CMP-04767-000028-2, "CONN RCP USB2.0 TYP C 24P SMD RA", Current Rating=1.25A, Max Operating Temperature=85°C, Min Operating Temperature=-40°C, Voltage Rating=30V, Contact Material="Gold, Nickel", Gender=Receptacle, Height=3.36mm, NexarPartId=117190526, Number of Contacts=16, USB Standard="USB 2.0"

## Via types
v1: diameter 24, hole 12, Top Layer to Bottom Layer, tented both sides, 77 vias
v2: diameter 24, hole 14, Top Layer to Bottom Layer, tented both sides, 29 vias
v3: diameter 24, hole 14, Top Layer to Bottom Layer, 1 vias

## Nets (pads, with @x,y where several pads share a name; then routed paths per layer and width w, separated by ;. In a path a pad name is that pad's centre, name@x,y a point inside that pad or via, vN(x,y) a via of type N, cw(c..) or ccw(c..) an arc to the next point about the centre after c; other vN are vias at no path point)
3V3_RAIL: "OLED CONN.1" "OLED CONN.9" C2.2 C3.2 C4.2 C5.2 C6.2 R1.2 R2.2 R3.1 R5.2 U1.3 U2.5 | length 3991.5
  Top Layer w12: R5.2 50,1500 30,1480 30,1404.89 41.31,1393.58 68.87,1393.58 C5.2 C6.2 147.78,1392.44 140,1384.66 C4.2@140,1321.99 ; C4.2@139.02,1322.97 133.52,1317.48 C4.2 C4.2@140,1321.99 ; C4.2@149.02,1332.97 155.08,1339.04 157.05,1339.04 165.72,1347.7 182.7,1347.7 v3(185,1350) ; C4.2@150,1331.99 C4.2@140,1321.99 ; U1.3 274.59,1427.17 291.75,1410 v2(295,1410)
  Top Layer w14: R2.2 254.98,680.63 254.98,655.02 270,640 330,640 347.89,657.89 347.89,684.59 350.71,687.41 587.41,687.41 670,770 670,815 657.64,827.36 628.86,827.36 621.22,835
  Top Layer w15: C2.2 v1(555,175)
  Top Layer w25: R3.1 190.12,184.88 v1(195,180) ; v2(295,1410) v2(330,1375) ; v1(470,140) 470,118.21 C3.2
  PWR w25: v1(195,180) 220,155 435.48,155 ; 306.26,835 351.26,880 445.36,880 460,894.64 460,895 347.5,1007.5 347.5,1047.5 334.14,1060.86 ; v2(330,1375) 330,1217.5 292.5,1180 292.5,1102.5 334.14,1060.86 ; 460,894.36 585.64,894.36 610.1,869.9 610.1,846.12 621.22,835 ; 650,195 697.5,195 727.5,225 727.5,311.41 731.46,315.37 731.46,953.54 580,1105 378.27,1105 334.14,1060.86
  Bottom Layer w12: v3(185,1350) 187.3,1352.3 237.3,1352.3 v2(295,1410)
  Bottom Layer w25: v1(635,150) 635,114.75 635.38,114.37 U2.5
BAT_SENSE: C_BAT1.2 R_BAT1.2 R_BAT2.1 U1.6 | length 336.2
  Top Layer w8: C_BAT1.2 76.52,1224.13 60.94,1208.56 R_BAT2.1 61.12,1177.54 129.83,1177.54 135.08,1182.79 147.79,1182.79 165,1200 165,1271.52 217.26,1323.77 233.22,1323.77 U1.6
BTN_GPIO0: BOOT/USER.1 BOOT/USER.2 C9.2 R5.1 U1.4 | length 1656.1
  Top Layer w10: R5.1 137.56,1497.37 146.34,1488.59 158.85,1488.59 198.7,1448.74 198.7,1422.3 224.3,1396.7 233.22,1396.7 U1.4 238.79,1391.13 273.87,1391.13 325.59,1339.41 325.59,1229.05 380,1174.64 v2(380,1060) ; v2(684.59,725.41) 684.59,721.62 670,707.03 670,592.35 BOOT/USER.1 BOOT/USER.2 674.36,275 723.5,275 756.06,307.56 C9.2
  Bottom Layer w10: v2(380,1060) 515,925 625,925 684.59,865.41 v2(684.59,725.41)
CHIP_PU: C7.2 R3.2 RST.1 RST.2 U1.45 | length 2093
  Top Layer w10: C7.2 121.57,352.56 139.13,335 v2(140,335) 140,281.06 98.94,240 R3.2 ; v2(390,275) 390.72,275 RST.2 RST.1 400,597.27 400,636.66 v2(420,656.66) ; U1.45 789.45,1492.05 820.24,1492.05 v1(822.28,1490) ; v1(815,910) 840,935 v1(840,1335)
  Bottom Layer w10: v2(140,335) 298.82,335 358.82,275 v2(390,275) ; v2(420,656.66) 423.79,656.66 435.45,645 700.36,645 736.94,681.58 736.94,846.48 773.52,883.06 788.06,883.06 v1(815,910) ; v1(822.28,1490) 822.28,1355.47 840,1337.75 v1(840,1335)
GND: "OLED CONN.2" BOOT/USER.3 BOOT/USER.4 C1.2 C2.1 C3.1 C4.1 C5.1 C6.1 C7.1 C8.1 C9.1 C10.1 C_BAT1.1 P1.2 P2.2 Q1.2 R4.1 R6.2 R7.2 R8.2 R_BAT2.2 R_LOAD.2 R_PROG.2 RST.3 RST.4 U1.1 U1.2 U1.42 U1.43 U1.46 U1.47 U1.48 U1.49 U1.50 U1.51 U1.52 U1.53 U1.54 U1.55 U1.56 U1.57 U1.58 U1.59 U1.60 U1.61 U1.62 U1.63 U1.64 U1.65 U1.66 U1.67 U1.68 U1.69 U1.70 U1.71 U1.72 U1.73 U2.2 U3.2 USB-C.1 USB-C.2 USB-C.3 USB-C.4 USB-C.A1-B12 USB-C.B1-A12 | length 2359.4
  Top Layer w14: C4.1@60,1310 60,1308.03 92.24,1275.79 92.24,1274.26 v1(105.3,1261.21) 105.3,1246.99 113.5,1238.79 124.86,1238.79 131.64,1232.01 C_BAT1.1 ; v1(75,290) 75,292.44 C7.1 ; v1(195,990) 196.91,988.09 232.39,988.09 U1.63 ; U1.2 236.85,1460 v1(270,1460) ; U1.1 237.22,1493.09 266.91,1493.09 v1(267.95,1492.05) ; U1.62 U1.60 278.56,1534.43 278.56,1516.44 288.09,1506.91 308.09,1506.91 v1(310,1505) 310.51,1505.51 310.51,1534.92 U1.59 ; v1(343.58,1503.58) 343.58,1534.52 U1.58 ; U1.57 378.95,1534.43 378.95,1506.05 v1(380,1505) ; v1@411.42,1502.68 U1.56 ; v1(420,35) 442,57 464.22,57 C3.1 ; v1(445,30) 489.93,30 499.37,39.44 534.44,39.44 C2.1 ; v1(445,1500) U1.55@445,1533.15 ; v1@478.09,1503.09 U1.54@478.09,1532.78 ; v1(510,1500) 511.81,1501.81 U1.53 ; v1(545,1500) 545.14,1500.14 545.14,1535.3 U1.52 ; U1.51 578.74,1501.26 v1(580,1500) ; v1(610,1500) 611.2,1501.2 611.2,1534.43 U1.50 ; v1@645.67,1500.67 U1.49 ; U1.48 679.57,1535 679.57,1500.43 v1(680,1500) ; U1.47 712.6,1505.11 715,1502.71 v1(715,1500) ; v1@746.2,1501.2 U1.46@746.2,1534.43 ; v1@760,1393.7 U1.42 ; v1@760,1427.17 U1.43 ; v1(787.4,942.4) U1.64 ; U1.65 819.57,1535.43 v1(830,1525)
  Top Layer w20: C5.1 v1(110,1447.56) C6.1 ; RST.4 219.23,280.68 219.23,285.89 v1(230,296.66) ; RST.3 215.57,590 v1(230,590) ; v1@410,1190 441.97,1190 U1.68 ; v1@410,1260 446.69,1260 U1.67 ; v1@410,1330 441.65,1330 U1.66 ; BOOT/USER.4 540.45,276.82 v1(563.96,253.31) ; BOOT/USER.3 540.45,589.81 v1(543.96,593.31) ; v1@510,1360 510,1326.61 U1.73 ; U1.69 535.27,1171.42 535.27,1170.81 540,1166.08 v1(540,1165) ; U1.70 609.23,1227.34 609.23,1229.23 v1(610,1230) ; U1.71 619.84,1259.84 v1(620,1260) ; U1.72 581.57,1320 v1(620,1320) ; v1@760,220 C9.1 ; USB-C.A1-B12 775.46,549.6 819.6,549.6 v1(820,550) ; USB-C.B1-A12 776.87,802.98 811.9,802.98 818.92,810 v1(820,810) ; v1(860,1395) R6.2
  Bottom Layer w14: R4.1 v1(65,140) ; v1(115,105) 116.91,106.91 116.91,130.78 120.31,134.18 Q1.2 ; v1(458.96,408.31) 459.29,408.64 493.77,408.64 U3.2 ; U2.2 739.42,75.01 v1(785,75) ; C10.1 945,338.96 v1(945,380) ; R8.2 964.14,675.86 v1(965,675) ; R7.2 964.77,580.23 v1(975,570)
  Bottom Layer w16: R_LOAD.2 326.56,495.91 v1(343.96,513.31)
  Bottom Layer w20: R_PROG.2 v1@498.3,511.49 ; C8.1@596.51,439.16 613.35,456 613.35,487.71 v1(613.96,488.31)
  Bottom Layer w25: v1@61.04,441.88 C1.2
  other v1: 760,210 61.04,431.88 508.3,511.49 60.94,1141.94 480,1180 400,1190 480,1230 540,1230 400,1260 480,1290 550,1290 400,1330 510,1370 750,1390 750,1430 645,1500 745,1500 412.05,1502.05 477.05,1502.05
LCDCS_OLED: "OLED CONN.6" U1.14 | length 440.7
  Top Layer w8: U1.14 236.69,1059.53 269.53,1059.53 v1(270,1060) ; v1(286.34,880.11) 311.52,880.11 347.99,843.65 347.99,812.01 365.34,794.66 385.97,794.66 424.37,756.26
  Bottom Layer w8: v1(270,1060) 270.67,1060 294,1036.67 294,961.15 280,947.15 280,890.78 286.34,884.44 v1(286.34,880.11)
LCDDC_OLED: "OLED CONN.7" U1.17 | length 180
  Top Layer w10: U1.17 311.02,976.25 314.02,973.25 314.14,973.25 320,967.39 320,940 385,875 385,835
LCDRST_OLED: "OLED CONN.8" U1.18 | length 593
  Top Layer w8: U1.18 346.86,986.62 346.86,1006.86 360.25,1020.25 v1(380.71,1020.25) ; v1(474.82,929.82) 502.8,901.84 502.8,807.2 520,790 v1(545,790)
  Bottom Layer w8: 345.63,756.26 381.25,791.88 543.12,791.88 v1(545,790) ; v1(380.71,1020.25) 382.55,1020.25 472.98,929.82 v1(474.82,929.82)
MOSI_OLED: "OLED CONN.4" U1.15 | length 566.3
  Top Layer w8: U1.15 238.89,1022.92 267.33,1022.92 v1(270,1020.25)
  Bottom Layer w8: v1(270,1020.25) 260,1010.25 263.14,835.64 cw(c227.52,835) 262.98,831.58 262.98,831.22 262.98,827.91 305.44,785.44 305.44,734.56 325,715 461.85,715 503.11,756.26
NetD1_2: D1.2 M1.2 Q1.3 | length 830.7
  Top Layer w10: v2(329.84,87.32) 332.23,89.72 491.7,89.72 512.47,110.49 512.47,167.83 544.64,200 705.43,200 720.43,185 v2(885,185)
  Bottom Layer w10: Q1.3 266.22,96.78 D1.2 275.67,87.32 v2(329.84,87.32) ; v2(885,185) 887.68,187.68 897.68,187.68 M1.2
NetD2_1: D2.1 U3.1 | length 315
  Top Layer w10: v2@545,378.31 545,360 586.69,318.31 586.69,300.58 v2(588.96,298.31)
  Bottom Layer w10: U3.1 509.07,446.37 543.96,411.48 v2(543.96,378.31) ; v2(588.96,298.31) 608.96,278.31 650.45,278.31 D2.1
NetD2_2: D2.2 R_LED.2 | length 136
  Bottom Layer w10: R_LED.2 531.66,243.31 546.66,228.31 574.31,228.31 589.31,243.31 D2.2
NetQ1_1: Q1.1 R4.2 U1.8 | length 1480.9
  Top Layer w10: U1.8 286.05,1259.84 291.21,1265 v1(295,1265)
  Bottom Layer w10: Q1.1 126.58,60.91 66.53,60.91 R4.2 61.06,62.44 35,88.5 35,97.68 34.28,98.39 34.28,136.72 35,137.44 35,340 105,410 105,843.01 138.32,876.33 189.54,876.33 222.86,909.64 222.86,1192.86 v1(295,1265)
NetR6_1: R6.1 U1.44 | length 83
  Top Layer w10: U1.44 788.94,1459.09 832.6,1459.09 856.06,1482.56 R6.1
NetR7_1: R7.1 USB-C.A5 | length 154.7
  Top Layer w10: USB-C.A5 875.24,625.97 886.21,615 v2(890,615)
  Bottom Layer w10: v2(890,615) R7.1
NetR8_1: R8.1 USB-C.B5 | length 158.6
  Top Layer w10: USB-C.B5 775.52,744.54 884.54,744.54 v2(885,745)
  Bottom Layer w10: v2(885,745) 903.94,745 R8.1 R8.1
NetR_PROG_1: R_PROG.1 U3.5 | length 67
  Bottom Layer w10: U3.5 408.48,448.64 408.48,509.22 R_PROG.1
SCLK_OLED: "OLED CONN.5" U1.16 | length 292.7
  Top Layer w10: U1.16 277.56,942.44 v2(315,905) ; v1(380,925) 380,921.87 463.74,838.13 463.74,835
  Bottom Layer w10: v2(315,905) 318.54,905 338.54,925 v1(380,925)
SIM_DTR: P2.5 U1.12 | length 810.8
  Top Layer w10: U1.12 315.23,1125.98 321.21,1120 v2(325,1120)
  Bottom Layer w10: v2(325,1120) 327,1122 617,1122 683,1188 788.1,1188 P2.5
SIM_PWR: P2.6 U1.11 | length 893.6
  Top Layer w10: U1.11 236.5,1159.72 324.72,1159.72 v2(325,1160)
  Bottom Layer w10: v2(325,1160) 345,1140 609.54,1140 675.54,1206 780.64,1206 885,1310.36 885,1370 934.76,1419.76 934.76,1420.85 949.49,1435.58 P2.6
SIM_RX: P2.4 U1.21 | length 671.2
  Top Layer w10: U1.21 447.17,986.54 447.17,1007.17 467,1027 627.36,1027 v2(675.18,1074.82)
  Bottom Layer w10: v2(675.18,1074.82) 674.82,1075.18 674.82,1150.17 694.64,1170 870.1,1170 P2.4
SIM_TX: P2.3 U1.20 | length 625.3
  Top Layer w10: U1.20 411.42,1016.42 440,1045 610,1045 v2(700,1135)
  Bottom Layer w10: v2(700,1135) 703.79,1135 718.18,1149.39 P2.3
SYS_VCC: C10.2 D1.1 D3.1 M1.1 P2.1 Q2.2 U2.1 U2.3 | length 2375.3
  Top Layer w18: v2(275,360) 275,230 v2(390,115) ; v2(850,150) 851.62,150 861.1,140.53 909.47,140.53 M1.1
  Bottom Layer w18: D3.1@144.36,586.3 143.05,586.3 127.24,570.49 127.24,425.46 151.44,401.27 260.53,401.27 263.09,398.71 264.46,398.71 275,388.17 v2(275,360) ; v2(390,115) 391,114 391,96 D1.1 449.02,95 464.02,80 671.22,80 702.47,111.25 734.34,111.25 U2.1 739.89,111.94 798.06,111.94 ; U2.3 799.57,39.57 820,60 ; C10.2 902.58,85 845,85 820,60 ; P2.1 850.68,850.58 850.68,150.68 848.85,148.85 834.98,148.85 798.06,111.94 ; 798.06,111.94 820,90 820,60
TPINT_OLED: "OLED CONN.12" U1.9 | length 550.4
  Top Layer w10: U1.9 269.83,1226.38 278.89,1217.32 v1(282.68,1217.32)
  Bottom Layer w10: 188.15,756.26 188.15,849.48 240.86,902.19 240.86,1175.5 v1(282.68,1217.32)
TPRST_OLED: "OLED CONN.13" U1.10 | length 398.8
  Top Layer w8: 148.78,835 148.78,1113.47 228.22,1192.91 U1.10
TPSCL_OLED: "OLED CONN.11" R2.1 U1.7 | length 686.6
  Top Layer w8: v1(175,1100) 175,1095.67 166.75,1087.42 166.75,895.77 227.52,835 ; v2(192.94,1257.06) 196,1260.12 196,1274.46 213.05,1291.5 234.42,1291.5 U1.7
  Top Layer w10: R2.1 193.08,691.34 227.52,725.78 227.52,835
  Bottom Layer w8: v1(175,1100) 175,1239.12 v2(192.94,1257.06)
TPSDA_OLED: "OLED CONN.10" R1.1 U1.5 | length 879.4
  Top Layer w10: v1(197.86,920) 207.86,910 207.95,910 266.89,851.06 266.89,756.26 295.59,727.56 R1.1@295.59,687.41 ; U1.5 237.9,1358.56 266.44,1358.56 v2(285,1340)
  Bottom Layer w10: v1(197.86,920) 195,920 130,985 130,1245 205,1320 265,1320 v2(285,1340)
USB_D+: U1.24 USB-C.A6 USB-C.B6 | length 526.1
  Top Layer w10: U1.24 545.28,947.72 560,933 647.46,933 735,845.46 735,693.12 ; USB-C.A6 774.28,666.12 747.04,666.12 735,678.16 735,693.12 ; USB-C.B6 774.28,703.94 745.81,703.94 735,693.12
USB_D-: U1.23 USB-C.A7 USB-C.B7 | length 632.2
  Top Layer w10: U1.23 511.81,933.19 530,915 640,915 717,838 717,670.71 741.27,646.44 774.28,646.44 USB-C.B7 775.84,646.44 803.08,646.44 810.7,654.05 810.7,676.64 803.08,684.25 775.84,684.25 USB-C.A7
VBAT_RAW: C1.1 P1.1 Q2.3 R_BAT1.1 U3.3 | length 1279.1
  Top Layer w12: R_BAT1.1 127.09,1139.37 127.09,1122.09 75.5,1070.5 75.5,1034.5 80,1030 36.47,986.47 36.47,661.77 45,653.25 v2(45,650) 135,560 135,527.27 v2(228.96,433.31) 356.47,433.31 363.5,426.28 363.5,408.77 v2(363.96,408.31)
  Bottom Layer w12: v2(45,650) 45,585.32 C1.1 ; Q2.3 172.98,435.3 226.97,435.3 v2(228.96,433.31) ; v2(363.96,408.31) 420.32,408.31 455.01,373.62 492.04,373.62 U3.3
VBUS_5V: C8.2 D3.2 Q2.1 R_LED.1 R_LOAD.1 U3.4 USB-C.A4-B9 USB-C.B4-A9 | length 1345.6
  Top Layer w15: v2(698.96,368.31) 725,394.36 725,565 739.75,579.75 774.11,579.75 USB-C.A4-B9 ; USB-C.B4-A9 775.13,769.61 814.93,769.61 v2(815,769.54) ; USB-C.A4-B9@775.49,581.13 814.31,581.13 v2(814.74,581.56)
  Bottom Layer w15: D3.2@276.64,586.3 275.34,586.3 243.96,554.92 Q2.1 259.15,473.31 263.2,469.26 263.2,468.79 271.99,460 R_LOAD.1@329.89,460 ; R_LOAD.1 326.56,400.91 355.91,371.57 U3.4 ; U3.4@411.31,371.57 414.89,367.98 414.89,347.38 426.93,335.34 ; R_LED.1 468.21,243.31 426.93,284.6 426.93,335.34 ; C8.2 610.73,366.37 590.56,346.2 590.56,344.18 569.69,323.31 438.96,323.31 426.93,335.34 ; C8.2@616.37,368.31 v2(698.96,368.31) ; v2(814.74,581.56) 816.22,583.04 816.22,768.32 v2(815,769.54)
pads on no net: "OLED CONN.3" U1.13 U1.19 U1.22 U1.25 U1.26 U1.27 U1.28 U1.29 U1.30 U1.31 U1.32 U1.33 U1.34 U1.35 U1.36 U1.37 U1.38 U1.39 U1.40 U1.41 U2.4 USB-C.A8 USB-C.B8

## Polygon pours and split planes (outlines as drawn)
3V3_RAIL on PWR "GND_ESP" (solid, remove dead copper, pour order 0): 435,209.81 435,130 675,130 675,207.52
GND on GND (split plane): 1003.53,1508.05 1003.53,20.1 20.1,20.1 20.1,1511.68 63.13,1554.71 956.87,1554.71

## Silkscreen, mask and mechanical layers (free items; w line width, h text height)
Top Overlay:
  text "Created by:" at 33,108.33 h16
  text "AAKASHDIP DEY" at 34,79 h20
  text "For: DHIMANT TEWARI" at 34,44 h18

## Text inside footprints (layer, text, board x,y; h text height)
U1: Top Overlay "*" at 182.72,1469.09 h50; Top 3D Body "*" at 264.72,1469.09 h50